# Altium PCB XEM7310_Breakout.PcbDoc (part 3 of 3)
Units mil, origin at the board's own origin, x right, y up, seen from the top; angles counter-clockwise.
Board outline 5980 x 6510 mil, 4 copper layers (Top, Ground Plane, Power Plane, Bottom), stack 61.497 mil thick; 68 components, 204 nets, 832 pads, 382 vias.
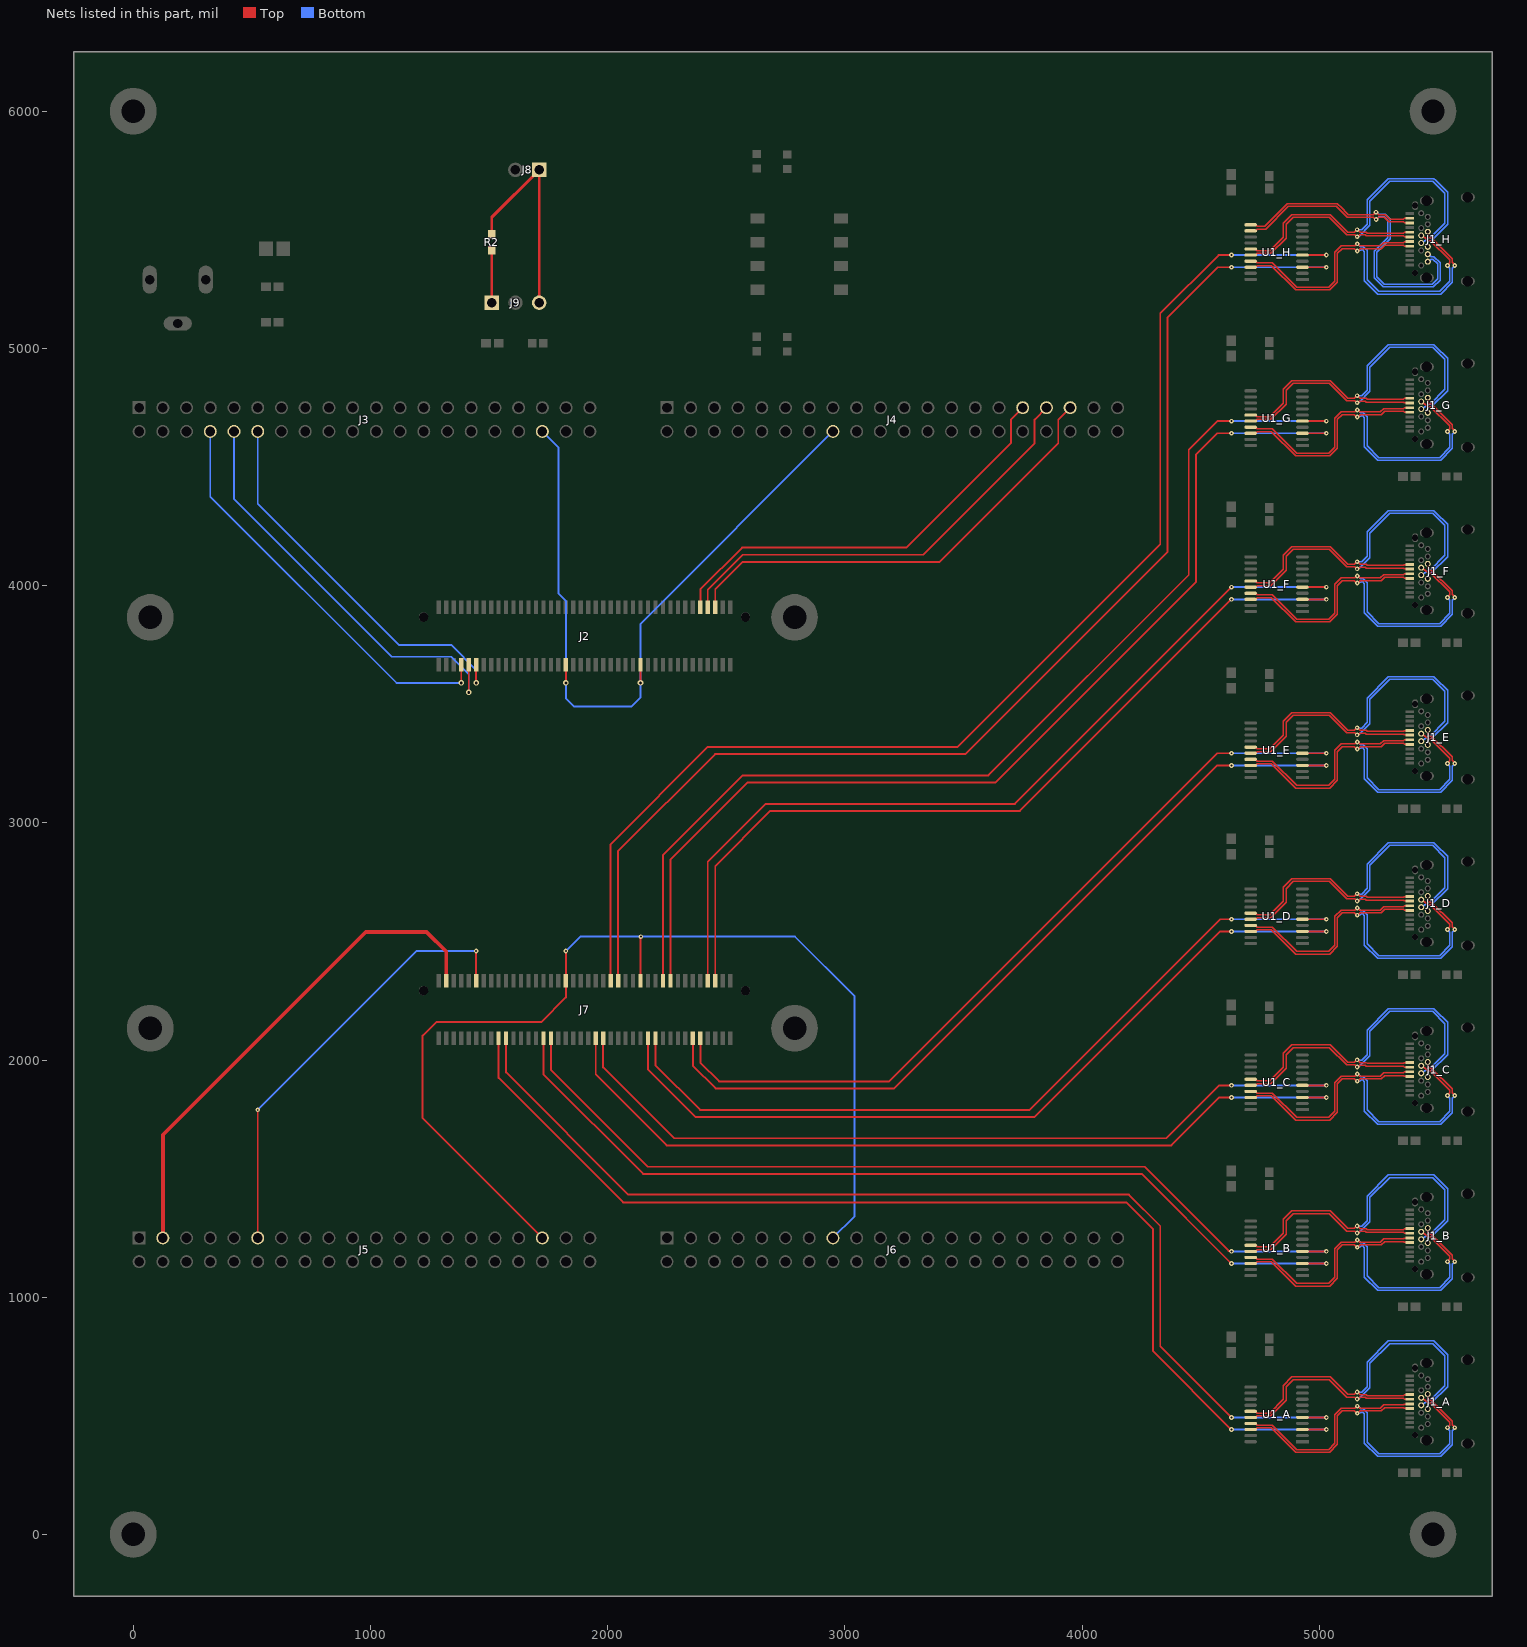
[diagram p5: the nets of this part, all layers, seen from the top]

## Via types
v1: diameter 20, hole 8, Top to Bottom, 190 vias
v2: diameter 24, hole 12, Top to Bottom, 154 vias
v3: diameter 32, hole 16, Top to Bottom, 38 vias

## Nets (pads, with @x,y where several pads share a name; then routed paths per layer and width w, separated by ;. In a path a pad name is that pad's centre, name@x,y a point inside that pad or via, vN(x,y) a via of type N, cw(c..) or ccw(c..) an arc to the next point about the centre after c; other vN are vias at no path point) (continued)
MISO_H_N: J1_H.A11 J1_H.B11 U1_H.11 | length 1487.1
  Top w6.3: U1_H.11@4710.73,5521.27 4732.63,5521.27 4739.78,5514.13 4770.19,5514.13 4865.79,5609.72 5076.69,5609.72 5083.31,5603.1 5087.99,5598.42 5122.41,5564 5227.47,5564 5237.86,5574.39 v1(5239.46,5574.39) ; v1@5240,5572.39 5243.17,5572.39 5251.51,5564.04 5278.65,5564.04 5298.3,5544.39 5355.67,5544.39 5359.24,5547.95 5381.77,5547.95 J1_H.A11@5382.4,5548.58
  Bottom w6.3: v1(5239.46,5574.39) 5241.17,5574.39 v1@5243.17,5572.39 ; v1@5239.48,5573.09 5244.04,5573.09 5251.34,5565.79 5278.1,5565.79 5299.5,5544.39 5299.5,5462.26 5243.17,5405.92 5243.17,5301.52 5274.16,5270.53 5476.6,5270.53 5498.7,5292.63 5498.7,5355.88 5478.97,5375.61 5472.89,5375.61 5462.8,5365.51 J1_H.B11@5457.6,5365.51
MISO_H_P: J1_H.A10 J1_H.B10 U1_H.12 | length 1520.6
  Top w6.3: U1_H.12@4710.73,5495.68 4732.63,5495.68 4739.78,5502.83 4774.87,5502.83 4870.47,5598.42 5072.01,5598.42 5117.73,5552.7 5228.41,5552.7 5237.21,5543.9 v1(5240.11,5543.9) ; v1@5240.2,5544.39 5243.17,5544.39 5251.51,5552.74 5273.96,5552.74 5293.62,5533.09 5355.67,5533.09 5359.24,5529.53 5381.77,5529.53 J1_H.A10@5382.4,5528.9
  Bottom w6.3: v1(5240.11,5543.9) 5241.71,5543.9 5252.3,5554.49 5273.42,5554.49 5288.2,5539.71 5288.2,5466.94 5231.86,5410.6 5231.86,5296.84 5269.47,5259.23 5481.28,5259.23 5510,5287.95 5510,5360.56 5483.65,5386.91 5472.89,5386.91 5462.8,5397.01 J1_H.B10@5457.6,5397.01
MOSI_A: J7.20 U1_A.5 | length 4601.3
  Top w8: J7.20@1571.93,2091.02 1571.93,1948.07 2087.01,1432.99 4197.24,1432.99 4330,1300.24 4330,793.32 v1(4630,493.32) ; U1_A.5@4929.27,493.32 v1(5030,493.32)
  Bottom w8: v1(4630,493.32) v1(5030,493.32)
MOSI_A_N: J1_A.A8 J1_A.B8 U1_A.15 | length 1641.2
  Top w6.3: U1_A.15@4710.73,518.91 4732.63,518.91 4739.78,511.77 4791.12,511.77 4848.7,569.35 4848.7,627.67 4885.07,664.04 5047.54,664.04 5121.28,590.3 5146.83,590.3 5157.29,600.76 5162.77,600.76 5174.03,589.49 5198.65,589.49 5202.8,585.34 5355.67,585.34 5359.24,588.9 5381.77,588.9 J1_A.A8@5382.4,589.53
  Bottom w6.3: v1(5160,600.76) 5161.15,599.6 5178.45,599.6 5202.01,623.15 5202.01,726.13 5291.86,815.99 5483.65,815.99 5491.64,807.99 5541.3,758.33 5541.3,622.52 5473.03,554.25 5463.77,554.25 5456.59,547.06 5456.59,529.51 J1_A.B8@5457.6,528.5
MOSI_A_P: J1_A.A7 J1_A.B7 U1_A.16 | length 1621.5
  Top w6.3: U1_A.16@4710.73,493.32 4732.63,493.32 4739.78,500.46 4795.8,500.46 4860,564.66 4860,622.99 4889.75,652.74 5042.86,652.74 5116.6,579 5149.01,579 5157.26,570.76 5163.73,570.76 5169.16,576.18 5169.51,576.18 5171.51,578.19 5193.96,578.19 5198.12,574.03 5355.67,574.03 5359.24,570.47 5381.77,570.47 J1_A.A7@5382.4,569.84
  Bottom w6.3: v1(5160.03,570.76) 5163.73,570.76 5168.67,575.69 5170.53,575.69 5213.31,618.47 5213.31,721.45 5296.54,804.68 5478.97,804.68 5530,753.65 5530,627.2 5468.35,565.55 5459.09,565.55 5447.99,554.45 5445.46,554.45 5435.26,544.25 J1_A.B7@5430.04,544.25
MOSI_B: J7.32 U1_B.5 | length 3819
  Top w8: J7.32@1760.91,2091.02 1760.91,1959.09 2170,1550 4263.9,1550 4618.28,1195.62 4627.7,1195.62 v1(4630,1193.32) ; U1_B.5@4929.27,1193.32 v1(5030,1193.32)
  Bottom w8: v1(4630,1193.32) v1(5030,1193.32)
MOSI_B_N: J1_B.A8 J1_B.B8 U1_B.15 | length 1641.2
  Top w6.3: U1_B.15@4710.73,1218.91 4732.63,1218.91 4739.78,1211.77 4791.12,1211.77 4848.7,1269.35 4848.7,1327.67 4885.07,1364.04 5047.54,1364.04 5121.28,1290.3 5146.83,1290.3 5157.29,1300.76 5162.77,1300.76 5174.03,1289.49 5198.65,1289.49 5202.8,1285.34 5355.67,1285.34 5359.24,1288.9 5381.77,1288.9 J1_B.A8@5382.4,1289.53
  Bottom w6.3: v1(5160,1300.76) 5161.15,1299.6 5178.45,1299.6 5202.01,1323.15 5202.01,1426.13 5291.86,1515.99 5483.65,1515.99 5491.64,1507.99 5541.3,1458.33 5541.3,1322.52 5473.03,1254.25 5463.77,1254.25 5456.59,1247.06 5456.59,1229.51 J1_B.B8@5457.6,1228.5
MOSI_B_P: J1_B.A7 J1_B.B7 U1_B.16 | length 1621.5
  Top w6.3: U1_B.16@4710.73,1193.32 4732.63,1193.32 4739.78,1200.46 4795.8,1200.46 4860,1264.66 4860,1322.99 4889.75,1352.74 5042.86,1352.74 5116.6,1279 5149.01,1279 5157.26,1270.76 5163.73,1270.76 5169.16,1276.18 5169.51,1276.18 5171.51,1278.19 5193.96,1278.19 5198.12,1274.03 5355.67,1274.03 5359.24,1270.47 5381.77,1270.47 J1_B.A7@5382.4,1269.84
  Bottom w6.3: v1(5160.03,1270.76) 5163.73,1270.76 5168.67,1275.69 5170.53,1275.69 5213.31,1318.47 5213.31,1421.45 5296.54,1504.68 5478.97,1504.68 5530,1453.65 5530,1327.2 5468.35,1265.55 5459.09,1265.55 5447.99,1254.45 5445.46,1254.45 5435.26,1244.25 J1_B.B7@5430.04,1244.25
MOSI_C: J7.46 U1_C.5 | length 3488
  Top w8: J7.46@1981.38,2091.02 1981.38,1968.62 2280,1670 4355.73,1670 4579.05,1893.32 v1(4630,1893.32) ; U1_C.5@4929.27,1893.32 v1(5030,1893.32)
  Bottom w8: v1(4630,1893.32) v1(5030,1893.32)
MOSI_C_N: J1_C.A8 J1_C.B8 U1_C.15 | length 1641.2
  Top w6.3: U1_C.15@4710.73,1918.91 4732.63,1918.91 4739.78,1911.77 4791.12,1911.77 4848.7,1969.35 4848.7,2027.67 4885.07,2064.04 5047.54,2064.04 5121.28,1990.3 5146.83,1990.3 5157.29,2000.76 5162.77,2000.76 5174.03,1989.49 5198.65,1989.49 5202.8,1985.34 5355.67,1985.34 5359.24,1988.9 5381.77,1988.9 J1_C.A8@5382.4,1989.53
  Bottom w6.3: v1(5160,2000.76) 5161.15,1999.6 5178.45,1999.6 5202.01,2023.15 5202.01,2126.13 5291.86,2215.99 5483.65,2215.99 5491.64,2207.99 5541.3,2158.33 5541.3,2022.52 5473.03,1954.25 5463.77,1954.25 5456.59,1947.06 5456.59,1929.51 J1_C.B8@5457.6,1928.5
MOSI_C_P: J1_C.A7 J1_C.B7 U1_C.16 | length 1621.5
  Top w6.3: U1_C.16@4710.73,1893.32 4732.63,1893.32 4739.78,1900.46 4795.8,1900.46 4860,1964.66 4860,2022.99 4889.75,2052.74 5042.86,2052.74 5116.6,1979 5149.01,1979 5157.26,1970.76 5163.73,1970.76 5169.16,1976.18 5169.51,1976.18 5171.51,1978.19 5193.96,1978.19 5198.12,1974.03 5355.67,1974.03 5359.24,1970.47 5381.77,1970.47 J1_C.A7@5382.4,1969.84
  Bottom w6.3: v1(5160.03,1970.76) 5163.73,1970.76 5168.67,1975.69 5170.53,1975.69 5213.31,2018.47 5213.31,2121.45 5296.54,2204.68 5478.97,2204.68 5530,2153.65 5530,2027.2 5468.35,1965.55 5459.09,1965.55 5447.99,1954.45 5445.46,1954.45 5435.26,1944.25 J1_C.B7@5430.04,1944.25
MOSI_D: J7.60 U1_D.5 | length 3452.4
  Top w8: J7.60@2201.85,2091.02 2201.85,1978.15 2390,1790 3778.78,1790 4582.1,2593.32 v1(4630,2593.32) ; U1_D.5@4929.27,2593.32 v1(5030,2593.32)
  Bottom w8: v1(4630,2593.32) v1(5030,2593.32)
MOSI_D_N: J1_D.A8 J1_D.B8 U1_D.15 | length 1641.2
  Top w6.3: U1_D.15@4710.73,2618.91 4732.63,2618.91 4739.78,2611.77 4791.12,2611.77 4848.7,2669.35 4848.7,2727.67 4885.07,2764.04 5047.54,2764.04 5121.28,2690.3 5146.83,2690.3 5157.29,2700.76 5162.77,2700.76 5174.03,2689.49 5198.65,2689.49 5202.8,2685.34 5355.67,2685.34 5359.24,2688.9 5381.77,2688.9 J1_D.A8@5382.4,2689.53
  Bottom w6.3: v1(5160,2700.76) 5161.15,2699.6 5178.45,2699.6 5202.01,2723.15 5202.01,2826.13 5291.86,2915.99 5483.65,2915.99 5491.64,2907.99 5541.3,2858.33 5541.3,2722.52 5473.03,2654.25 5463.77,2654.25 5456.59,2647.06 5456.59,2629.51 J1_D.B8@5457.6,2628.5
MOSI_D_P: J1_D.A7 J1_D.B7 U1_D.16 | length 1621.5
  Top w6.3: U1_D.16@4710.73,2593.32 4732.63,2593.32 4739.78,2600.46 4795.8,2600.46 4860,2664.66 4860,2722.99 4889.75,2752.74 5042.86,2752.74 5116.6,2679 5149.01,2679 5157.26,2670.76 5163.73,2670.76 5169.16,2676.18 5169.51,2676.18 5171.51,2678.19 5193.96,2678.19 5198.12,2674.03 5355.67,2674.03 5359.24,2670.47 5381.77,2670.47 J1_D.A7@5382.4,2669.84
  Bottom w6.3: v1(5160.03,2670.76) 5163.73,2670.76 5168.67,2675.69 5170.53,2675.69 5213.31,2718.47 5213.31,2821.45 5296.54,2904.68 5478.97,2904.68 5530,2853.65 5530,2727.2 5468.35,2665.55 5459.09,2665.55 5447.99,2654.45 5445.46,2654.45 5435.26,2644.25 J1_D.B7@5430.04,2644.25
MOSI_E: J7.72 U1_E.5 | length 3447.5
  Top w8: J7.72@2390.83,2091.02 2390.83,1989.17 2470,1910 3186.8,1910 4570.12,3293.32 v1(4630,3293.32) ; U1_E.5@4929.27,3293.32 v1(5030,3293.32)
  Bottom w8: v1(4630,3293.32) v1(5030,3293.32)
MOSI_E_N: J1_E.A8 J1_E.B8 U1_E.15 | length 1641.2
  Top w6.3: U1_E.15@4710.73,3318.91 4732.63,3318.91 4739.78,3311.77 4791.12,3311.77 4848.7,3369.35 4848.7,3427.67 4885.07,3464.04 5047.54,3464.04 5121.28,3390.3 5146.83,3390.3 5157.29,3400.76 5162.77,3400.76 5174.03,3389.49 5198.65,3389.49 5202.8,3385.34 5355.67,3385.34 5359.24,3388.9 5381.77,3388.9 J1_E.A8@5382.4,3389.53
  Bottom w6.3: v1(5160,3400.76) 5161.15,3399.6 5178.45,3399.6 5202.01,3423.15 5202.01,3526.13 5291.86,3615.99 5483.65,3615.99 5491.64,3607.99 5541.3,3558.33 5541.3,3422.52 5473.03,3354.25 5463.77,3354.25 5456.59,3347.06 5456.59,3329.51 J1_E.B8@5457.6,3328.5
MOSI_E_P: J1_E.A7 J1_E.B7 U1_E.16 | length 1621.5
  Top w6.3: U1_E.16@4710.73,3293.32 4732.63,3293.32 4739.78,3300.46 4795.8,3300.46 4860,3364.66 4860,3422.99 4889.75,3452.74 5042.86,3452.74 5116.6,3379 5149.01,3379 5157.26,3370.76 5163.73,3370.76 5169.16,3376.18 5169.51,3376.18 5171.51,3378.19 5193.96,3378.19 5198.12,3374.03 5355.67,3374.03 5359.24,3370.47 5381.77,3370.47 J1_E.A7@5382.4,3369.84
  Bottom w6.3: v1(5160.03,3370.76) 5163.73,3370.76 5168.67,3375.69 5170.53,3375.69 5213.31,3418.47 5213.31,3521.45 5296.54,3604.68 5478.97,3604.68 5530,3553.65 5530,3427.2 5468.35,3365.55 5459.09,3365.55 5447.99,3354.45 5445.46,3354.45 5435.26,3344.25 J1_E.B7@5430.04,3344.25
MOSI_F: J7.73 U1_F.5 | length 3689.6
  Top w8: J7.73@2422.32,2334.02 2422.32,2835.67 2666.65,3080 3716.68,3080 v1(4630,3993.32) ; U1_F.5@4929.27,3993.32 v1(5030,3993.32)
  Bottom w8: v1(4630,3993.32) v1(5030,3993.32)
MOSI_F_N: J1_F.A8 J1_F.B8 U1_F.15 | length 1641.2
  Top w6.3: U1_F.15@4710.73,4018.91 4732.63,4018.91 4739.78,4011.77 4791.12,4011.77 4848.7,4069.35 4848.7,4127.67 4885.07,4164.04 5047.54,4164.04 5121.28,4090.3 5146.83,4090.3 5157.29,4100.76 5162.77,4100.76 5174.03,4089.49 5198.65,4089.49 5202.8,4085.34 5355.67,4085.34 5359.24,4088.9 5381.77,4088.9 J1_F.A8@5382.4,4089.53
  Bottom w6.3: v1(5160,4100.76) 5161.15,4099.6 5178.45,4099.6 5202.01,4123.15 5202.01,4226.13 5291.86,4315.99 5483.65,4315.99 5491.64,4307.99 5541.3,4258.33 5541.3,4122.52 5473.03,4054.25 5463.77,4054.25 5456.59,4047.06 5456.59,4029.51 J1_F.B8@5457.6,4028.5
MOSI_F_P: J1_F.A7 J1_F.B7 U1_F.16 | length 1621.5
  Top w6.3: U1_F.16@4710.73,3993.32 4732.63,3993.32 4739.78,4000.46 4795.8,4000.46 4860,4064.66 4860,4122.99 4889.75,4152.74 5042.86,4152.74 5116.6,4079 5149.01,4079 5157.26,4070.76 5163.73,4070.76 5169.16,4076.18 5169.51,4076.18 5171.51,4078.19 5193.96,4078.19 5198.12,4074.03 5355.67,4074.03 5359.24,4070.47 5381.77,4070.47 J1_F.A7@5382.4,4069.84
  Bottom w6.3: v1(5160.03,4070.76) 5163.73,4070.76 5168.67,4075.69 5170.53,4075.69 5213.31,4118.47 5213.31,4221.45 5296.54,4304.68 5478.97,4304.68 5530,4253.65 5530,4127.2 5468.35,4065.55 5459.09,4065.55 5447.99,4054.45 5445.46,4054.45 5435.26,4044.25 J1_F.B7@5430.04,4044.25
MOSI_G: J7.61 U1_G.5 | length 4493.9
  Top w8: J7.61@2233.35,2334.02 2233.35,2863.35 2570,3200 3605.24,3200 4450,4044.76 4450,4572.51 4570.81,4693.32 v1(4630,4693.32) ; U1_G.5@4929.27,4693.32 v1(5030,4693.32)
  Bottom w8: v1(4630,4693.32) v1(5030,4693.32)
MOSI_G_N: J1_G.A8 J1_G.B8 U1_G.15 | length 1641.2
  Top w6.3: U1_G.15@4710.73,4718.91 4732.63,4718.91 4739.78,4711.77 4791.12,4711.77 4848.7,4769.35 4848.7,4827.67 4885.07,4864.04 5047.54,4864.04 5121.28,4790.3 5146.83,4790.3 5157.29,4800.76 5162.77,4800.76 5174.03,4789.49 5198.65,4789.49 5202.8,4785.34 5355.67,4785.34 5359.24,4788.9 5381.77,4788.9 J1_G.A8@5382.4,4789.53
  Bottom w6.3: v1(5160,4800.76) 5161.15,4799.6 5178.45,4799.6 5202.01,4823.15 5202.01,4926.13 5291.86,5015.99 5483.65,5015.99 5491.64,5007.99 5541.3,4958.33 5541.3,4822.52 5473.03,4754.25 5463.77,4754.25 5456.59,4747.06 5456.59,4729.51 J1_G.B8@5457.6,4728.5
MOSI_G_P: J1_G.A7 J1_G.B7 U1_G.16 | length 1621.5
  Top w6.3: U1_G.16@4710.73,4693.32 4732.63,4693.32 4739.78,4700.46 4795.8,4700.46 4860,4764.66 4860,4822.99 4889.75,4852.74 5042.86,4852.74 5116.6,4779 5149.01,4779 5157.26,4770.76 5163.73,4770.76 5169.16,4776.18 5169.51,4776.18 5171.51,4778.19 5193.96,4778.19 5198.12,4774.03 5355.67,4774.03 5359.24,4770.47 5381.77,4770.47 J1_G.A7@5382.4,4769.84
  Bottom w6.3: v1(5160.03,4770.76) 5163.73,4770.76 5168.67,4775.69 5170.53,4775.69 5213.31,4818.47 5213.31,4921.45 5296.54,5004.68 5478.97,5004.68 5530,4953.65 5530,4827.2 5468.35,4765.55 5459.09,4765.55 5447.99,4754.45 5445.46,4754.45 5435.26,4744.25 J1_G.B7@5430.04,4744.25
MOSI_H: J7.47 U1_H.5 | length 5292.6
  Top w8: J7.47@2012.87,2334.02 2012.87,2909.76 2423.11,3320 3476.1,3320 4330,4173.9 4330,5147.48 4575.84,5393.32 v1(4630,5393.32) ; U1_H.5@4929.27,5393.32 v1(5030,5393.32)
  Bottom w8: v1(4630,5393.32) v1(5030,5393.32)
MOSI_H_N: J1_H.A8 J1_H.B8 U1_H.15 | length 1641.2
  Top w6.3: U1_H.15@4710.73,5418.91 4732.63,5418.91 4739.78,5411.77 4791.12,5411.77 4848.7,5469.35 4848.7,5527.67 4885.07,5564.04 5047.54,5564.04 5121.28,5490.3 5146.83,5490.3 5157.29,5500.76 5162.77,5500.76 5174.03,5489.49 5198.65,5489.49 5202.8,5485.34 5355.67,5485.34 5359.24,5488.9 5381.77,5488.9 J1_H.A8@5382.4,5489.53
  Bottom w6.3: v1(5160,5500.76) 5161.15,5499.6 5178.45,5499.6 5202.01,5523.15 5202.01,5626.13 5291.86,5715.99 5483.65,5715.99 5491.64,5707.99 5541.3,5658.33 5541.3,5522.52 5473.03,5454.25 5463.77,5454.25 5456.59,5447.06 5456.59,5429.51 J1_H.B8@5457.6,5428.5
MOSI_H_P: J1_H.A7 J1_H.B7 U1_H.16 | length 1621.5
  Top w6.3: U1_H.16@4710.73,5393.32 4732.63,5393.32 4739.78,5400.46 4795.8,5400.46 4860,5464.66 4860,5522.99 4889.75,5552.74 5042.86,5552.74 5116.6,5479 5149.01,5479 5157.26,5470.76 5163.73,5470.76 5169.16,5476.18 5169.51,5476.18 5171.51,5478.19 5193.96,5478.19 5198.12,5474.03 5355.67,5474.03 5359.24,5470.47 5381.77,5470.47 J1_H.A7@5382.4,5469.84
  Bottom w6.3: v1(5160.03,5470.76) 5163.73,5470.76 5168.67,5475.69 5170.53,5475.69 5213.31,5518.47 5213.31,5621.45 5296.54,5704.68 5478.97,5704.68 5530,5653.65 5530,5527.2 5468.35,5465.55 5459.09,5465.55 5447.99,5454.45 5445.46,5454.45 5435.26,5444.25 J1_H.B7@5430.04,5444.25
NetJ8_1: J8.1 J9.3 R2.2 | length 914.4
  Top w12: R2.2@1511.49,5481.13 1511.49,5552.67 J8.1@1711.49,5752.67 J9.3@1711.49,5192.67
NetJ9_1: J9.1 R2.1 | length 221.5
  Top w12: J9.1@1511.49,5192.67 R2.1@1511.49,5414.2
SCLK_A: J7.18 U1_A.3 | length 4671.6
  Top w8: J7.18@1540.43,2091.02 1540.43,1924.57 2065,1400 4185.57,1400 4300,1285.57 4300,772.14 v1(4630,442.14) ; U1_A.3@4929.27,442.14 v1(5030,442.14)
  Bottom w8: v1(4630,442.14) v1(5030,442.14)
SCLK_A_N: J1_A.A6 J1_A.B6 U1_A.17 | length 1697.9
  Top w6.3: U1_A.17@4710.73,467.73 4732.63,467.73 4739.78,460.59 4802.6,460.59 4905.19,357.99 5039.55,357.99 5065.39,383.83 5065.39,505.15 5092.54,532.3 5149.03,532.3 5157.48,540.76 5163.17,540.76 5171.51,532.41 5257.87,532.41 5271.42,545.97 5355.67,545.97 5359.24,549.53 5381.77,549.53 J1_A.A6@5382.4,550.16 ; J1_A.B6@5430.04,575.75 5435.26,575.75 5445.46,565.55 5447.99,565.55 5459.09,554.45 5468.35,554.45 5549.65,473.15 5549.65,461.28 5540.98,452.6 v1(5540.98,449.95)
  Bottom w6.3: v1(5160.17,540.76) 5163.88,540.76 5175.41,529.22 5185.62,529.22 5202.01,512.83 5202.01,389.51 5251.51,340 5507.33,340 5550.5,383.17 5550.5,438.03 5540.98,447.55 v1(5540.98,449.95)
SCLK_A_P: J1_A.A5 J1_A.B5 U1_A.18 | length 1720
  Top w6.3: U1_A.18@4710.73,442.14 4732.63,442.14 4739.78,449.28 4797.92,449.28 4900.51,346.69 5044.23,346.69 5076.69,379.15 5076.69,500.46 5097.23,521 5147.18,521 5157.43,510.76 v1(5160.23,510.76) ; v1@5160.22,512.76 5164.91,512.76 5173.26,521.1 5262.55,521.1 5276.11,534.66 5355.67,534.66 5359.24,531.1 5381.77,531.1 J1_A.A5@5382.4,530.47 ; J1_A.B5@5457.6,591.5 5456.59,590.49 5456.59,572.94 5463.77,565.75 5473.03,565.75 5560.95,477.83 5560.95,462.72 5571.3,452.37 v1(5571.3,449.96)
  Bottom w6.3: v1(5160.23,510.76) 5162.85,513.38 5174.97,513.38 5177.61,516.02 5182.84,516.02 5190.7,508.15 5190.7,384.82 5246.83,328.7 5512.01,328.7 5561.8,378.49 5561.8,438.03 5571.3,447.54 v1(5571.3,449.96)
SCLK_B: J7.30 U1_B.3 | length 3882.5
  Top w8: J7.30@1729.41,2091.02 1729.41,1940.59 2150,1520 4252.14,1520 v1(4630,1142.14) ; U1_B.3@4929.27,1142.14 v1(5030,1142.14)
  Bottom w8: v1(4630,1142.14) v1(5030,1142.14)
SCLK_B_N: J1_B.A6 J1_B.B6 U1_B.17 | length 1697.9
  Top w6.3: U1_B.17@4710.73,1167.73 4732.63,1167.73 4739.78,1160.59 4802.6,1160.59 4905.19,1057.99 5039.55,1057.99 5065.39,1083.83 5065.39,1205.15 5092.54,1232.3 5149.03,1232.3 5157.48,1240.76 5163.17,1240.76 5171.51,1232.41 5257.87,1232.41 5271.42,1245.97 5355.67,1245.97 5359.24,1249.53 5381.77,1249.53 J1_B.A6@5382.4,1250.16 ; J1_B.B6@5430.04,1275.75 5435.26,1275.75 5445.46,1265.55 5447.99,1265.55 5459.09,1254.45 5468.35,1254.45 5549.65,1173.15 5549.65,1161.28 5540.98,1152.6 v1(5540.98,1149.95)
  Bottom w6.3: v1(5160.17,1240.76) 5163.88,1240.76 5175.41,1229.22 5185.62,1229.22 5202.01,1212.83 5202.01,1089.51 5251.51,1040 5507.33,1040 5550.5,1083.17 5550.5,1138.03 5540.98,1147.55 v1(5540.98,1149.95)
SCLK_B_P: J1_B.A5 J1_B.B5 U1_B.18 | length 1720
  Top w6.3: U1_B.18@4710.73,1142.14 4732.63,1142.14 4739.78,1149.28 4797.92,1149.28 4900.51,1046.69 5044.23,1046.69 5076.69,1079.15 5076.69,1200.46 5097.23,1221 5147.18,1221 5157.43,1210.76 v1(5160.23,1210.76) ; v1@5160.22,1212.76 5164.91,1212.76 5173.26,1221.1 5262.55,1221.1 5276.11,1234.66 5355.67,1234.66 5359.24,1231.1 5381.77,1231.1 J1_B.A5@5382.4,1230.47 ; J1_B.B5@5457.6,1291.5 5456.59,1290.49 5456.59,1272.94 5463.77,1265.75 5473.03,1265.75 5560.95,1177.83 5560.95,1162.72 5571.3,1152.37 v1(5571.3,1149.96)
  Bottom w6.3: v1(5160.23,1210.76) 5162.85,1213.38 5174.97,1213.38 5177.61,1216.02 5182.84,1216.02 5190.7,1208.15 5190.7,1084.82 5246.83,1028.7 5512.01,1028.7 5561.8,1078.49 5561.8,1138.03 5571.3,1147.54 v1(5571.3,1149.96)
SCLK_C: J7.44 U1_C.3 | length 3540.5
  Top w8: J7.44@1949.88,2091.02 1949.88,1938.98 2248.86,1640 4376.91,1640 4579.05,1842.14 v1(4630,1842.14) ; U1_C.3@4929.27,1842.14 v1(5030,1842.14)
  Bottom w8: v1(4630,1842.14) v1(5030,1842.14)
SCLK_C_N: J1_C.A6 J1_C.B6 U1_C.17 | length 1697.9
  Top w6.3: U1_C.17@4710.73,1867.73 4732.63,1867.73 4739.78,1860.59 4802.6,1860.59 4905.19,1757.99 5039.55,1757.99 5065.39,1783.83 5065.39,1905.15 5092.54,1932.3 5149.03,1932.3 5157.48,1940.76 5163.17,1940.76 5171.51,1932.41 5257.87,1932.41 5271.42,1945.97 5355.67,1945.97 5359.24,1949.53 5381.77,1949.53 J1_C.A6@5382.4,1950.16 ; J1_C.B6@5430.04,1975.75 5435.26,1975.75 5445.46,1965.55 5447.99,1965.55 5459.09,1954.45 5468.35,1954.45 5549.65,1873.15 5549.65,1861.28 5540.98,1852.6 v1(5540.98,1849.95)
  Bottom w6.3: v1(5160.17,1940.76) 5163.88,1940.76 5175.41,1929.22 5185.62,1929.22 5202.01,1912.83 5202.01,1789.51 5251.51,1740 5507.33,1740 5550.5,1783.17 5550.5,1838.03 5540.98,1847.55 v1(5540.98,1849.95)
SCLK_C_P: J1_C.A5 J1_C.B5 U1_C.18 | length 1720
  Top w6.3: U1_C.18@4710.73,1842.14 4732.63,1842.14 4739.78,1849.28 4797.92,1849.28 4900.51,1746.69 5044.23,1746.69 5076.69,1779.15 5076.69,1900.46 5097.23,1921 5147.18,1921 5157.43,1910.76 v1(5160.23,1910.76) ; v1@5160.22,1912.76 5164.91,1912.76 5173.26,1921.1 5262.55,1921.1 5276.11,1934.66 5355.67,1934.66 5359.24,1931.1 5381.77,1931.1 J1_C.A5@5382.4,1930.47 ; J1_C.B5@5457.6,1991.5 5456.59,1990.49 5456.59,1972.94 5463.77,1965.75 5473.03,1965.75 5560.95,1877.83 5560.95,1862.72 5571.3,1852.37 v1(5571.3,1849.96)
  Bottom w6.3: v1(5160.23,1910.76) 5162.85,1913.38 5174.97,1913.38 5177.61,1916.02 5182.84,1916.02 5190.7,1908.15 5190.7,1784.82 5246.83,1728.7 5512.01,1728.7 5561.8,1778.49 5561.8,1838.03 5571.3,1847.54 v1(5571.3,1849.96)
SCLK_D: J7.58 U1_D.3 | length 3498.4
  Top w8: J7.58@2170.35,2091.02 2170.35,1959.65 2370,1760 3799.96,1760 4582.1,2542.14 v1(4630,2542.14) ; U1_D.3@4929.27,2542.14 v1(5030,2542.14)
  Bottom w8: v1(4630,2542.14) v1(5030,2542.14)
SCLK_D_N: J1_D.A6 J1_D.B6 U1_D.17 | length 1697.9
  Top w6.3: U1_D.17@4710.73,2567.73 4732.63,2567.73 4739.78,2560.59 4802.6,2560.59 4905.19,2457.99 5039.55,2457.99 5065.39,2483.83 5065.39,2605.15 5092.54,2632.3 5149.03,2632.3 5157.48,2640.76 5163.17,2640.76 5171.51,2632.41 5257.87,2632.41 5271.42,2645.97 5355.67,2645.97 5359.24,2649.53 5381.77,2649.53 J1_D.A6@5382.4,2650.16 ; J1_D.B6@5430.04,2675.75 5435.26,2675.75 5445.46,2665.55 5447.99,2665.55 5459.09,2654.45 5468.35,2654.45 5549.65,2573.15 5549.65,2561.28 5540.98,2552.6 v1(5540.98,2549.95)
  Bottom w6.3: v1(5160.17,2640.76) 5163.88,2640.76 5175.41,2629.22 5185.62,2629.22 5202.01,2612.83 5202.01,2489.51 5251.51,2440 5507.33,2440 5550.5,2483.17 5550.5,2538.03 5540.98,2547.55 v1(5540.98,2549.95)
SCLK_D_P: J1_D.A5 J1_D.B5 U1_D.18 | length 1720
  Top w6.3: U1_D.18@4710.73,2542.14 4732.63,2542.14 4739.78,2549.28 4797.92,2549.28 4900.51,2446.69 5044.23,2446.69 5076.69,2479.15 5076.69,2600.46 5097.23,2621 5147.18,2621 5157.43,2610.76 v1(5160.23,2610.76) ; v1@5160.22,2612.76 5164.91,2612.76 5173.26,2621.1 5262.55,2621.1 5276.11,2634.66 5355.67,2634.66 5359.24,2631.1 5381.77,2631.1 J1_D.A5@5382.4,2630.47 ; J1_D.B5@5457.6,2691.5 5456.59,2690.49 5456.59,2672.94 5463.77,2665.75 5473.03,2665.75 5560.95,2577.83 5560.95,2562.72 5571.3,2552.37 v1(5571.3,2549.96)
  Bottom w6.3: v1(5160.23,2610.76) 5162.85,2613.38 5174.97,2613.38 5177.61,2616.02 5182.84,2616.02 5190.7,2608.15 5190.7,2484.82 5246.83,2428.7 5512.01,2428.7 5561.8,2478.49 5561.8,2538.03 5571.3,2547.54 v1(5571.3,2549.96)
SCLK_E: J7.70 U1_E.3 | length 3490.4
  Top w8: J7.70@2359.33,2091.02 2359.33,1975.98 2455.32,1880 3207.98,1880 4570.12,3242.14 v1(4630,3242.14) ; U1_E.3@4929.27,3242.14 v1(5030,3242.14)
  Bottom w8: v1(4630,3242.14) v1(5030,3242.14)
SCLK_E_N: J1_E.A6 J1_E.B6 U1_E.17 | length 1697.9
  Top w6.3: U1_E.17@4710.73,3267.73 4732.63,3267.73 4739.78,3260.59 4802.6,3260.59 4905.19,3157.99 5039.55,3157.99 5065.39,3183.83 5065.39,3305.15 5092.54,3332.3 5149.03,3332.3 5157.48,3340.76 5163.17,3340.76 5171.51,3332.41 5257.87,3332.41 5271.42,3345.97 5355.67,3345.97 5359.24,3349.53 5381.77,3349.53 J1_E.A6@5382.4,3350.16 ; J1_E.B6@5430.04,3375.75 5435.26,3375.75 5445.46,3365.55 5447.99,3365.55 5459.09,3354.45 5468.35,3354.45 5549.65,3273.15 5549.65,3261.28 5540.98,3252.6 v1(5540.98,3249.95)
  Bottom w6.3: v1(5160.17,3340.76) 5163.88,3340.76 5175.41,3329.22 5185.62,3329.22 5202.01,3312.83 5202.01,3189.51 5251.51,3140 5507.33,3140 5550.5,3183.17 5550.5,3238.03 5540.98,3247.55 v1(5540.98,3249.95)
SCLK_E_P: J1_E.A5 J1_E.B5 U1_E.18 | length 1720
  Top w6.3: U1_E.18@4710.73,3242.14 4732.63,3242.14 4739.78,3249.28 4797.92,3249.28 4900.51,3146.69 5044.23,3146.69 5076.69,3179.15 5076.69,3300.46 5097.23,3321 5147.18,3321 5157.43,3310.76 v1(5160.23,3310.76) ; v1@5160.22,3312.76 5164.91,3312.76 5173.26,3321.1 5262.55,3321.1 5276.11,3334.66 5355.67,3334.66 5359.24,3331.1 5381.77,3331.1 J1_E.A5@5382.4,3330.47 ; J1_E.B5@5457.6,3391.5 5456.59,3390.49 5456.59,3372.94 5463.77,3365.75 5473.03,3365.75 5560.95,3277.83 5560.95,3262.72 5571.3,3252.37 v1(5571.3,3249.96)
  Bottom w6.3: v1(5160.23,3310.76) 5162.85,3313.38 5174.97,3313.38 5177.61,3316.02 5182.84,3316.02 5190.7,3308.15 5190.7,3184.82 5246.83,3128.7 5512.01,3128.7 5561.8,3178.49 5561.8,3238.03 5571.3,3247.54 v1(5571.3,3249.96)
SCLK_F: J7.75 U1_F.3 | length 3626
  Top w8: J7.75@2453.82,2334.02 2453.82,2817.17 2686.65,3050 3737.86,3050 v1(4630,3942.14) ; U1_F.3@4929.27,3942.14 v1(5030,3942.14)
  Bottom w8: v1(4630,3942.14) v1(5030,3942.14)
SCLK_F_N: J1_F.A6 J1_F.B6 U1_F.17 | length 1697.9
  Top w6.3: U1_F.17@4710.73,3967.73 4732.63,3967.73 4739.78,3960.59 4802.6,3960.59 4905.19,3857.99 5039.55,3857.99 5065.39,3883.83 5065.39,4005.15 5092.54,4032.3 5149.03,4032.3 5157.48,4040.76 5163.17,4040.76 5171.51,4032.41 5257.87,4032.41 5271.42,4045.97 5355.67,4045.97 5359.24,4049.53 5381.77,4049.53 J1_F.A6@5382.4,4050.16 ; J1_F.B6@5430.04,4075.75 5435.26,4075.75 5445.46,4065.55 5447.99,4065.55 5459.09,4054.45 5468.35,4054.45 5549.65,3973.15 5549.65,3961.28 5540.98,3952.6 v1(5540.98,3949.95)
  Bottom w6.3: v1(5160.17,4040.76) 5163.88,4040.76 5175.41,4029.22 5185.62,4029.22 5202.01,4012.83 5202.01,3889.51 5251.51,3840 5507.33,3840 5550.5,3883.17 5550.5,3938.03 5540.98,3947.55 v1(5540.98,3949.95)
SCLK_F_P: J1_F.A5 J1_F.B5 U1_F.18 | length 1720
  Top w6.3: U1_F.18@4710.73,3942.14 4732.63,3942.14 4739.78,3949.28 4797.92,3949.28 4900.51,3846.69 5044.23,3846.69 5076.69,3879.15 5076.69,4000.46 5097.23,4021 5147.18,4021 5157.43,4010.76 v1(5160.23,4010.76) ; v1@5160.22,4012.76 5164.91,4012.76 5173.26,4021.1 5262.55,4021.1 5276.11,4034.66 5355.67,4034.66 5359.24,4031.1 5381.77,4031.1 J1_F.A5@5382.4,4030.47 ; J1_F.B5@5457.6,4091.5 5456.59,4090.49 5456.59,4072.94 5463.77,4065.75 5473.03,4065.75 5560.95,3977.83 5560.95,3962.72 5571.3,3952.37 v1(5571.3,3949.96)
  Bottom w6.3: v1(5160.23,4010.76) 5162.85,4013.38 5174.97,4013.38 5177.61,4016.02 5182.84,4016.02 5190.7,4008.15 5190.7,3884.82 5246.83,3828.7 5512.01,3828.7 5561.8,3878.49 5561.8,3938.03 5571.3,3947.54 v1(5571.3,3949.96)
SCLK_G: J7.63 U1_G.3 | length 4434.8
  Top w8: J7.63@2264.84,2334.02 2264.84,2843.35 2591.5,3170 3635.5,3170 4480,4014.5 4480,4551.33 4570.81,4642.14 v1(4630,4642.14) ; U1_G.3@4929.27,4642.14 v1(5030,4642.14)
  Bottom w8: v1(4630,4642.14) v1(5030,4642.14)
SCLK_G_N: J1_G.A6 J1_G.B6 U1_G.17 | length 1697.9
  Top w6.3: U1_G.17@4710.73,4667.73 4732.63,4667.73 4739.78,4660.59 4802.6,4660.59 4905.19,4557.99 5039.55,4557.99 5065.39,4583.83 5065.39,4705.15 5092.54,4732.3 5149.03,4732.3 5157.48,4740.76 5163.17,4740.76 5171.51,4732.41 5257.87,4732.41 5271.42,4745.97 5355.67,4745.97 5359.24,4749.53 5381.77,4749.53 J1_G.A6@5382.4,4750.16 ; J1_G.B6@5430.04,4775.75 5435.26,4775.75 5445.46,4765.55 5447.99,4765.55 5459.09,4754.45 5468.35,4754.45 5549.65,4673.15 5549.65,4661.28 5540.98,4652.6 v1(5540.98,4649.95)
  Bottom w6.3: v1(5160.17,4740.76) 5163.88,4740.76 5175.41,4729.22 5185.62,4729.22 5202.01,4712.83 5202.01,4589.51 5251.51,4540 5507.33,4540 5550.5,4583.17 5550.5,4638.03 5540.98,4647.55 v1(5540.98,4649.95)
SCLK_G_P: J1_G.A5 J1_G.B5 U1_G.18 | length 1720
  Top w6.3: U1_G.18@4710.73,4642.14 4732.63,4642.14 4739.78,4649.28 4797.92,4649.28 4900.51,4546.69 5044.23,4546.69 5076.69,4579.15 5076.69,4700.46 5097.23,4721 5147.18,4721 5157.43,4710.76 v1(5160.23,4710.76) ; v1@5160.22,4712.76 5164.91,4712.76 5173.26,4721.1 5262.55,4721.1 5276.11,4734.66 5355.67,4734.66 5359.24,4731.1 5381.77,4731.1 J1_G.A5@5382.4,4730.47 ; J1_G.B5@5457.6,4791.5 5456.59,4790.49 5456.59,4772.94 5463.77,4765.75 5473.03,4765.75 5560.95,4677.83 5560.95,4662.72 5571.3,4652.37 v1(5571.3,4649.96)
  Bottom w6.3: v1(5160.23,4710.76) 5162.85,4713.38 5174.97,4713.38 5177.61,4716.02 5182.84,4716.02 5190.7,4708.15 5190.7,4584.82 5246.83,4528.7 5512.01,4528.7 5561.8,4578.49 5561.8,4638.03 5571.3,4647.54 v1(5571.3,4649.96)
SCLK_H: J7.49 U1_H.3 | length 5232
  Top w8: J7.49@2044.37,2334.02 2044.37,2881.26 2453.11,3290 3508.49,3290 4360,4141.51 4360,5130 4572.14,5342.14 v1(4630,5342.14) ; U1_H.3@4929.27,5342.14 v1(5030,5342.14)
  Bottom w8: v1(4630,5342.14) v1(5030,5342.14)
SCLK_H_N: J1_H.A6 J1_H.B6 U1_H.17 | length 1697.9
  Top w6.3: U1_H.17@4710.73,5367.73 4732.63,5367.73 4739.78,5360.59 4802.6,5360.59 4905.19,5257.99 5039.55,5257.99 5065.39,5283.83 5065.39,5405.15 5092.54,5432.3 5149.03,5432.3 5157.48,5440.76 5163.17,5440.76 5171.51,5432.41 5257.87,5432.41 5271.42,5445.97 5355.67,5445.97 5359.24,5449.53 5381.77,5449.53 J1_H.A6@5382.4,5450.16 ; J1_H.B6@5430.04,5475.75 5435.26,5475.75 5445.46,5465.55 5447.99,5465.55 5459.09,5454.45 5468.35,5454.45 5549.65,5373.15 5549.65,5361.28 5540.98,5352.6 v1(5540.98,5349.95)
  Bottom w6.3: v1(5160.17,5440.76) 5163.88,5440.76 5175.41,5429.22 5185.62,5429.22 5202.01,5412.83 5202.01,5289.51 5251.51,5240 5507.33,5240 5550.5,5283.17 5550.5,5338.03 5540.98,5347.55 v1(5540.98,5349.95)
SCLK_H_P: J1_H.A5 J1_H.B5 U1_H.18 | length 1720
  Top w6.3: U1_H.18@4710.73,5342.14 4732.63,5342.14 4739.78,5349.28 4797.92,5349.28 4900.51,5246.69 5044.23,5246.69 5076.69,5279.15 5076.69,5400.46 5097.23,5421 5147.18,5421 5157.43,5410.76 v1(5160.23,5410.76) ; v1@5160.22,5412.76 5164.91,5412.76 5173.26,5421.1 5262.55,5421.1 5276.11,5434.66 5355.67,5434.66 5359.24,5431.1 5381.77,5431.1 J1_H.A5@5382.4,5430.47 ; J1_H.B5@5457.6,5491.5 5456.59,5490.49 5456.59,5472.94 5463.77,5465.75 5473.03,5465.75 5560.95,5377.83 5560.95,5362.72 5571.3,5352.37 v1(5571.3,5349.96)
  Bottom w6.3: v1(5160.23,5410.76) 5162.85,5413.38 5174.97,5413.38 5177.61,5416.02 5182.84,5416.02 5190.7,5408.15 5190.7,5284.82 5246.83,5228.7 5512.01,5228.7 5561.8,5278.49 5561.8,5338.03 5571.3,5347.54 v1(5571.3,5349.96)
status_led_1: J2.75 J4.35 | length 1947.1
  Top w8: J2.75@2453.82,3908.82 2453.82,3983.82 2570,4100 3400,4100 3900,4600 3900,4700 J4.35@3950,4750
status_led_2: J2.73 J4.33 | length 1877.7
  Top w8: J2.73@2422.32,3908.82 2422.32,3982.32 2570,4130 3330,4130 3800,4600 3800,4700 J4.33@3850,4750
status_led_3: J2.71 J4.31 | length 1810.1
  Top w8: J2.71@2390.83,3908.82 2390.83,3983.82 2567.01,4160 3260,4160 3700,4600 3700,4700 J4.31@3750,4750
SYS_CLK_MC1: J2.08 J3.08 | length 1733.9
  Top w8: v2(1382.95,3590) J2.08@1382.95,3665.83
  Bottom w8: J3.08@325,4650 325,4375 1110,3590 v2(1382.95,3590)
SYS_CLK_MC2: J5.11 J7.11 | length 1864.5
  Top w8: J5.11@525,1250 v1(525,1790) ; J7.11@1445.95,2334.02 v1(1445.95,2460)
  Bottom w8: v1(525,1790) 1195,2460 v1(1445.95,2460)
VBAT: J5.03 J7.03 | length 2141.6
  Top w16: J5.03@125,1250 125,1685 980,2540 1237.15,2540 1319.96,2457.19 J7.03@1319.96,2334.02
VCCO_MC1: J2.36 J2.56 J3.36 J4.16 | length 3119.7
  Top w8: v2(1823.9,3590) J2.36@1823.9,3665.83 ; v2(2138.86,3590) J2.56@2138.86,3665.83
  Bottom w8: J3.36@1725,4650 1792.4,4582.6 1792.4,3967.6 1823.9,3936.1 v2(1823.9,3590) 1823.9,3526.1 1860,3490 2100,3490 2138.86,3528.86 v2(2138.86,3590) 2138.86,3838.86 J4.16@2950,4650
VCCO_MC2: J5.35 J6.15 J7.35 J7.55 | length 4516.1
  Top w8: J5.35@1725,1250 1220.35,1754.65 1220.35,2102.82 1277.54,2160 1720,2160 1823.9,2263.9 J7.35@1823.9,2334.02 v1(1823.9,2459.31) ; J7.55@2138.86,2334.02 2139.43,2334.59 2139.43,2519.43 v1(2140,2520)
  Bottom w8: v1(1823.9,2459.31) 1884.59,2520 v1(2140,2520) 2790,2520 3040,2270 3040,1340 J6.15@2950,1250
XADC_VN: J2.10 J3.10 | length 1772.1
  Top w8: v2(1414.45,3550) J2.10@1414.45,3665.83
  Bottom w8: J3.10@425,4650 425,4365 1090,3700 1340,3700 1414.45,3625.55 v2(1414.45,3550)
XADC_VP: J2.12 J3.12 | length 1646.2
  Top w8: v2(1445.95,3590) J2.12@1445.95,3665.83
  Bottom w8: J3.12@525,4650 525,4345 1120,3750 1340,3750 1445.95,3644.05 v2(1445.95,3590)
pads on no net: J1_A. J1_B. J1_C. J1_D. J1_E. J1_F. J1_G. J1_H. J2. J7. J10.3 U1_A.7 U1_A.13 U1_A.14 U1_B.7 U1_B.13 U1_B.14 U1_C.7 U1_C.13 U1_C.14 U1_D.7 U1_D.13 U1_D.14 U1_E.7 U1_E.13 U1_E.14 U1_F.7 U1_F.13 U1_F.14 U1_G.7 U1_G.13 U1_G.14 U1_H.7 U1_H.13 U1_H.14

## Polygon pours and split planes (outlines as drawn)
GND on Top "GND_TOP" (solid, shelved, pour order 3): -200,6200 5680,6200 5680,-200 -200,-200
5V0 on Top "5V0_TOP" (solid, shelved, pour order 2): 1360,3860 1300,3800 410,3800 -200,4410 -200,6200 1880,6200 1880,4900 380,4900 280,4800 280,4730 250,4700 0,4700 -30,4670 -30,4605 495,4080 1300,4080 1360,4020
3V3 on Top "3V3_TOP" (solid, shelved, pour order 1): 1277.54,2120 1250,2092.46 1250,1938.98 1340,1938.98 1360,1958.98 1360,2120
GND on Bottom "GND_TOP" (solid, shelved, pour order 4): -200,6200 5680,6200 5680,-200 -200,-200
3V3 on Power Plane (split plane): 5709.9,-239.9 -229.9,-239.9 -229.9,6229.9 5709.9,6229.9
GND on Ground Plane (split plane): 5709.9,-239.9 -229.9,-239.9 -229.9,6229.9 5709.9,6229.9

## Silkscreen, mask and mechanical layers (free items; w line width, h text height)
Top Overlay:
  rectangle: 2529.2,-31.44 3037.79,271.83
  rectangle: 3430,5205 3610,5295
  rectangle: 3430,5405 3610,5495
  rectangle: 3620,5305 3800,5395
  rectangle: 3430,5505 3610,5595
  lines w10: -46.38,2015.75 2906.38,2015.75 2906.38,3984.25 -46.38,3984.25 -46.38,2015.75 ; 3420,5190 3810,5190 3810,5610 3420,5610 3420,5190
  text "Board" at 3198,5698 h40
  text "ON" at 3478,5660.52 h40
  text "OFF" at 3668,5660.52 h40
  text "Mode" at 3218,5625.28 h40
  text "3" at 3278,5528 h40
  text "2" at 3278,5428 h40
  text "1" at 3286,5328 h40
  text "0" at 3278,5228 h40
  text "MC1" at 2508,4011.07 h40
  text "MC2" at 2430.32,1948 h40
  text "Serial #" at 2525.98,254.98 h39.37
  text ".Project_Name" at 210.68,60 h78.74
  text ".Project_Revision" at 210.68,36.31 h40
  text "Revision" at 306.98,36.31 h40
Board Outline:
  the board outline again, w10